# Allegro board AHC-20-001_DP_Switch_Barrier_Block_Interface.brd
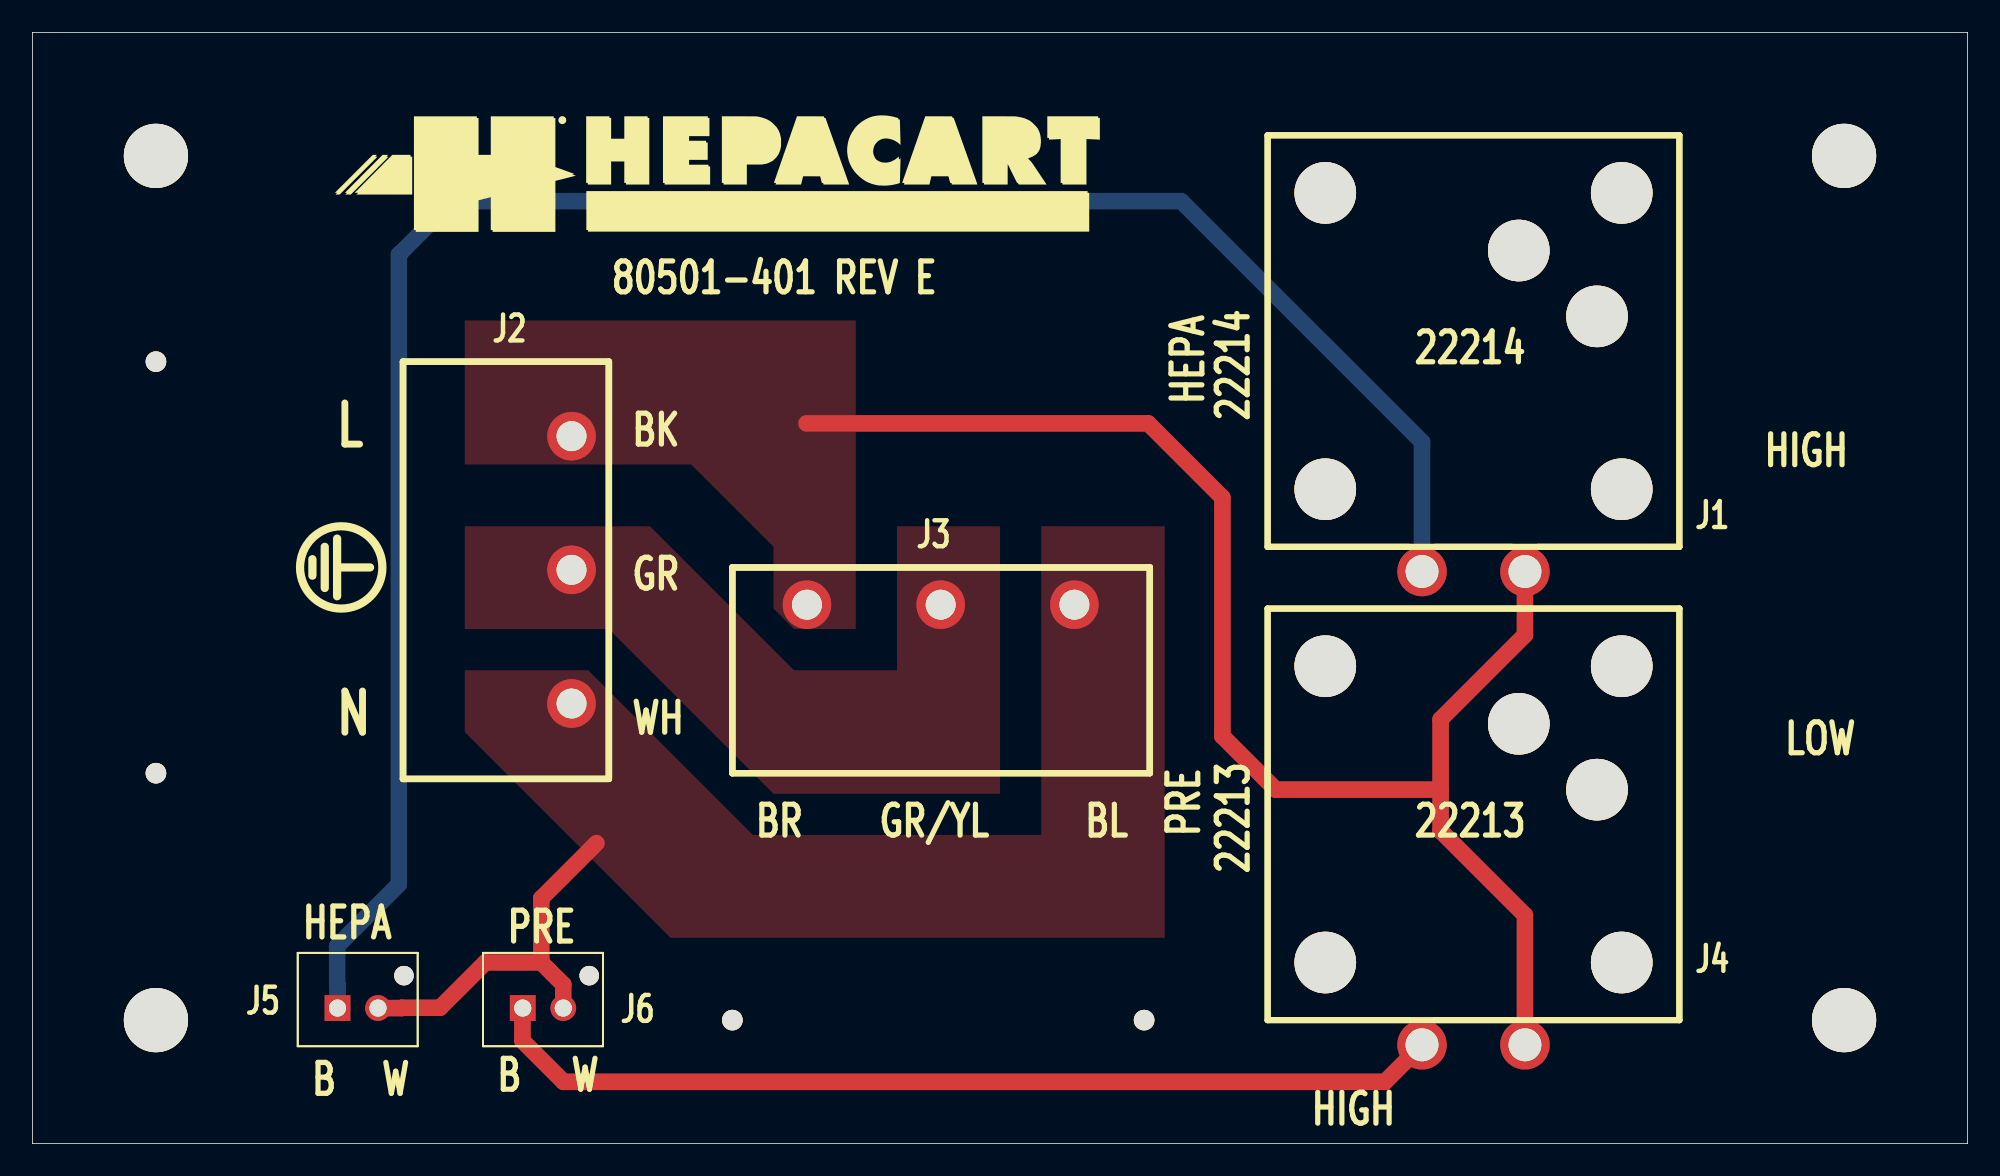
[diagram p0: board, top side]
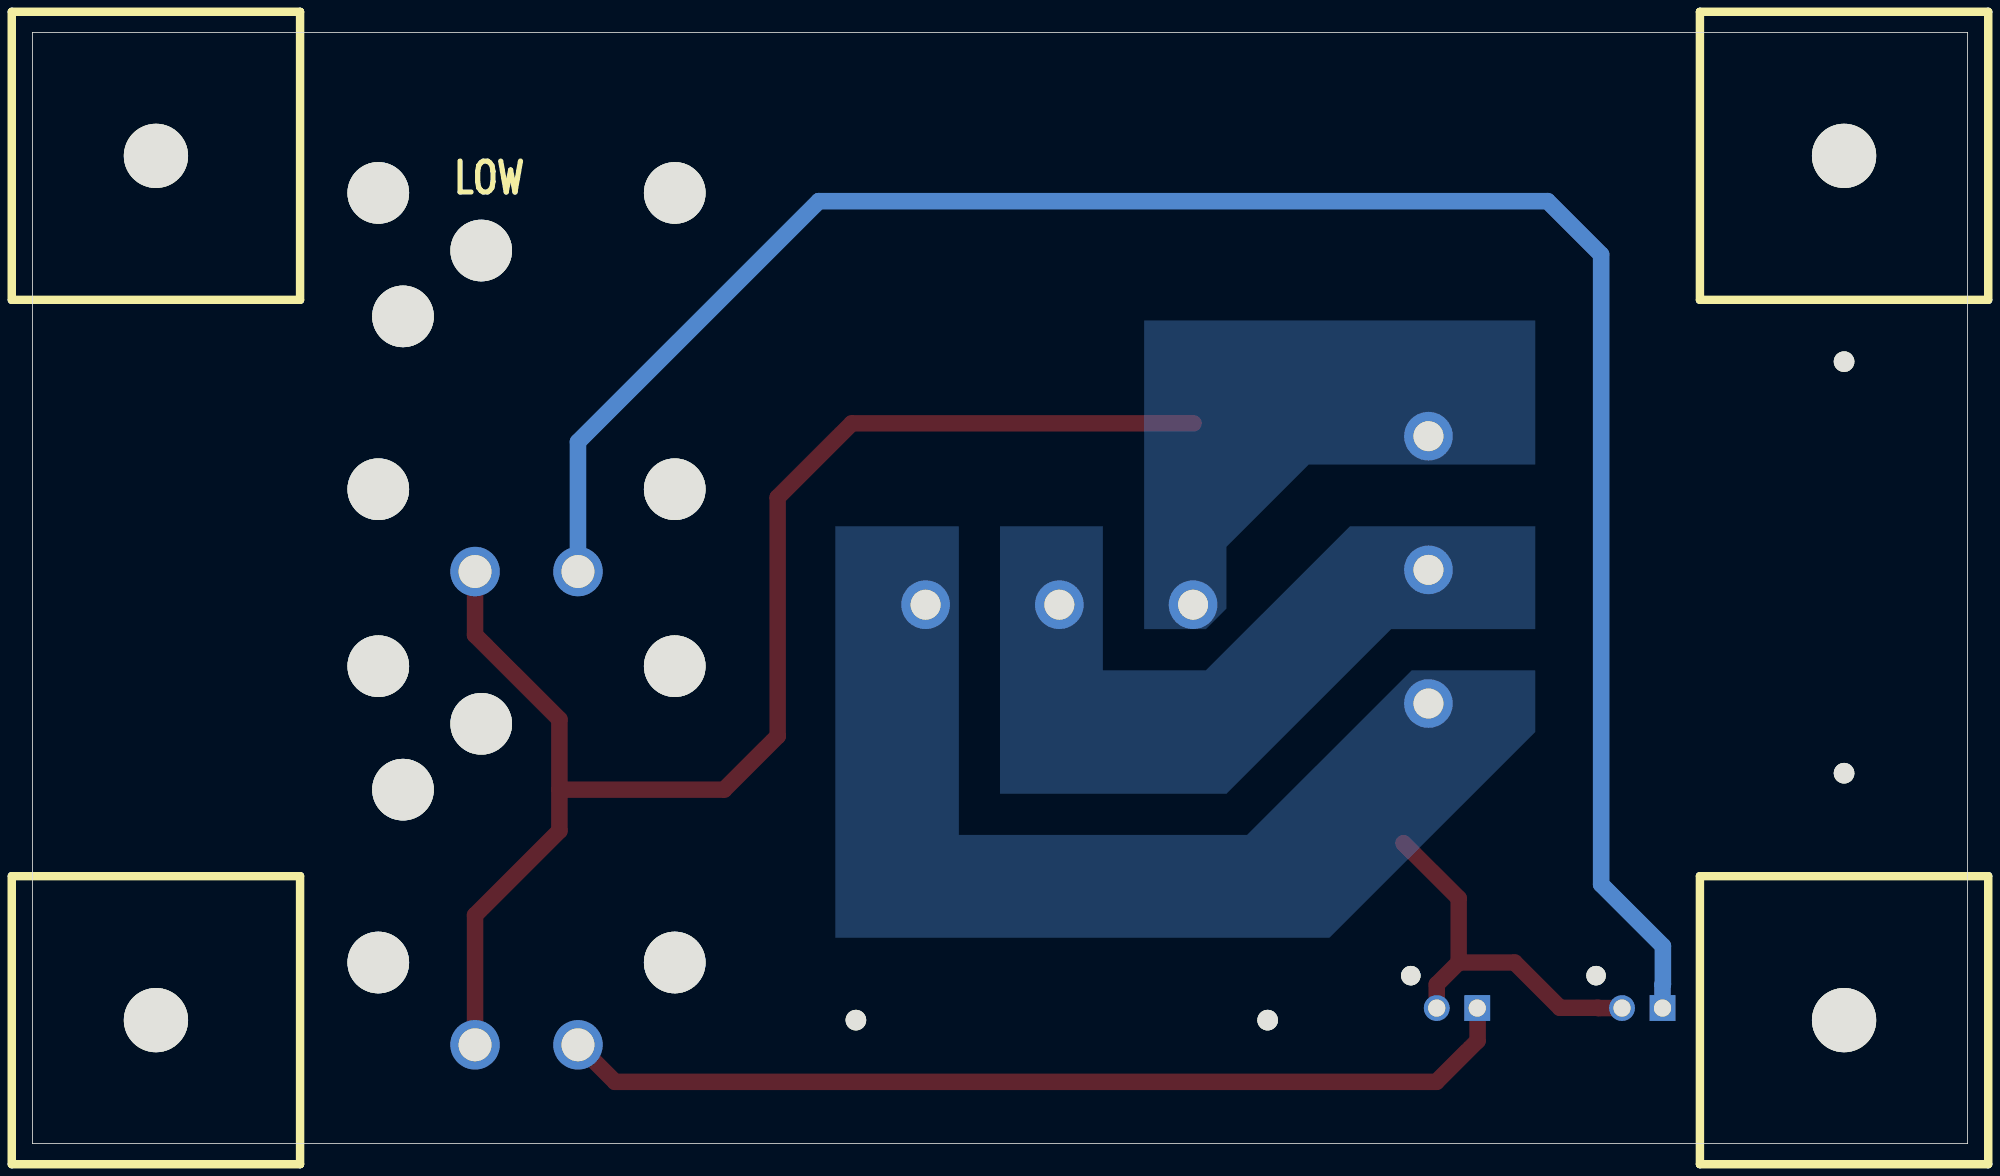
[diagram p1: board, bottom side, seen from below]

Outline 119.38 x 68.58 mm; copper layers: TOP, BOTTOM. Coordinates in mm from the lower left corner of the outline.
Outline path: 0,68.58 0,0 119.38,0 119.38,68.58 0,68.58

## Design rules (mm)
constraint set DEFAULT: min track width 0.152, pair gap 0.152

## Placement (name value [footprint] x y rotation side)
J1  PSF102-7451-712  [MULTICOMP_PSF102-7451-712]  76.2 62.23 90 top
J2  OSTYK42103030  [ONSHORE_OSTYK42103030]  22.86 48.26 270 top
J3  OSTYK42103030  [ONSHORE_OSTYK42103030]  43.18 22.86 0 top
J4  PSF102-7651-711  [MULTICOMP_PSF102-7651-711]  76.2 33.02 90 top
J5  B2B-XH-AM(LF)(SN)  [JST_B2B-XH-AM]  16.37 6.01 0 top
J6  B2B-XH-AM(LF)(SN)  [JST_B2B-XH-AM]  27.8 6.01 0 top
J7  LCBSB-4-01A-RT  [ESSENTRA_LCBSB-4-01A-RT]  120.65 52.07 180 bottom
J8  LCBSB-4-01A-RT  [ESSENTRA_LCBSB-4-01A-RT]  16.51 52.07 180 bottom
J9  LCBSB-4-01A-RT  [ESSENTRA_LCBSB-4-01A-RT]  120.65 -1.27 180 bottom
J10  LCBSB-4-01A-RT  [ESSENTRA_LCBSB-4-01A-RT]  16.51 -1.27 180 bottom
NOREF  -  []  18.39 56.06 0 top
NOREF#2  -  [unnamed#2]  7.62 48.26 0 top
NOREF#3  -  []  -17.78 -101.6 0 top
NOREF#4  -  []  7.62 60.96 90 top
NOREF#5  -  []  119.38 0 90 top
NOREF#6  -  [unnamed#2]  68.58 7.62 0 top
NOREF#7  -  []  0 0 0 top
NOREF#8  -  [unnamed#2]  43.18 7.62 0 top
NOREF#9  -  [unnamed#2]  7.62 22.86 0 top
NOREF#10  -  []  0 68.58 0 top

## Library data of the parts
J1 J4-J6 = CON_2
J2 J3 = CON_3
J7-J10 = MECHANICAL

## Footprints (pads in the part's own frame, mm; a bottom-side part is the same pattern mirrored in y, then rotated)
ESSENTRA_LCBSB-4-01A-RT
  round 3.962 hole 3.962 unplated: (8.89,8.89)
JST_B2B-XH-AM
  round 1.199 hole 1.199: (6.551,4.351)
  rect 1.59x1.59 hole 1.059: 1(2.451,2.349)
  round 1.59 hole 1.059: 2(4.95,2.349)
MULTICOMP_PSF102-7451-712
  round 3.8 hole 3.8: (-21.844,-3.556) (-21.844,-21.844) (-11.176,-20.32) (-7.112,-15.494) (-3.556,-3.556) (-3.556,-21.844)
  round 3.051 hole 2.029: 1(-26.924,-9.525) 2(-26.924,-15.875)
MULTICOMP_PSF102-7651-711
  round 3.8 hole 3.8: (-21.844,-3.556) (-21.844,-21.844) (-11.176,-20.32) (-7.112,-15.494) (-3.556,-3.556) (-3.556,-21.844)
  round 3.051 hole 2.029: 1(-26.924,-9.525) 2(-26.924,-15.875)
ONSHORE_OSTYK42103030
  round 3 hole 1.849: 1(4.6,10.399) 2(12.85,10.399) 3(21.1,10.399)
unnamed#2
  round 1.27 hole 3.962 unplated: (0,0)

## Nets
GND_EARTH: J2.2 J3.2
GND_NEUTRAL: J2.3 J3.3 J5.2 J6.2
HOT: J1.2 J2.1 J3.1 J4.2
N01013: J1.1 J5.1
N01019: J4.1 J6.1

## Routing (per net, layer and track width the routed paths; a pad name or vN(x,y) marks a point on that pad's centre or on a via; arc(x,y) is an arc through that point)
GND_NEUTRAL: length 23.4
  TOP w1.016: 34.8,18.54 31.39,15.14 31.39,11.18 ; 31.39,11.18 27.94,11.18 25.15,8.38 22.79,8.38 22.78,8.36 J5.2 ; 31.39,11.18 32.75,9.82 J6.2
HOT: length 90.6
  TOP w1.016: 86.87,21.84 76.71,21.84 73.41,25.15 73.41,39.88 68.83,44.45 47.75,44.45 ; 86.87,21.84 86.87,26.18 92.08,31.39 J1.2 ; 86.87,21.84 86.87,19.3 92.08,14.1 J4.2
N01013: length 126.7
  BOTTOM w1.016: J1.1 85.72,43.31 70.87,58.17 25.91,58.17 22.61,54.87 22.61,16 18.8,12.19 18.8,9.84 18.82,9.82 J5.1
N01019: length 59.5
  TOP w1.016: J6.1 30.23,8.34 30.23,6.35 32.77,3.81 83.44,3.81 J4.1

## Copper pours and planes (outline as drawn; the poured copper is in the pictures)
GND_EARTH on TOP, BOTTOM: 26.67,38.1 26.67,31.75 35.56,31.75 45.72,21.59 59.69,21.59 59.69,38.1 53.34,38.1 53.34,29.21 46.99,29.21 38.1,38.1
GND_NEUTRAL on TOP, BOTTOM: 26.67,29.21 34.29,29.21 44.45,19.05 62.23,19.05 62.23,38.1 69.85,38.1 69.85,12.7 39.37,12.7 26.67,25.4
HOT on TOP, BOTTOM: 26.67,50.8 50.8,50.8 50.8,31.75 46.99,31.75 45.72,33.02 45.72,36.83 40.64,41.91 26.67,41.91

## Text on the board
Ref Des/Silkscreen Bottom: LOW
Ref Des/Silkscreen Top: HEPA | B | W | PRE | 80501-401 REV E | BK | GR | WH | BR | GR/YL | BL | HIGH | 22214 | 22213 | LOW | L | N
XSECTION_CHART: STACKUP TABLE | Unit = Mils | # | 1 | 2 | NAME | TOP | BOTTOM | TYPE | SURFACE | CONDUCTOR | DIELECTRIC | MATERIAL | AIR | COPPER | FR-4 | TOTAL THICKNESS | THICKNESS | 0 | 1.7 | 58.6 | 62
User.6: FABRICATION NOTES (UNLESS OTHERWISE SPECIFIED): | 1. TOP SIDE SHOWN. | 2. BUILD IN ACCORDANCE WITH ALL IPC STANDARDS RELEVANT TO PRINTED | CIRCUIT BOARD FABRICATION. | 3. DIELECTRIC MATERIAL SHALL MEET THE REQUIREMENTS TYPE 370HR PER STACKUP | DETAIL OR EQUIVALENT AND SATISFY ANY IMPEDANCE REQUIREMENTS. | 4. DRILL HOLE, SLOT, AND CUTOUT DIMENSIONS ARE SHOWN AFTER PLATING. | 5. SILKSCREEN BOTH SIDES USING EPOXY OR ACRYLIC BASED WHITE NON-CONDUCTIVE | SILKSCREEN. SILKSCREEN TO BE REMOVED FROM ANY CONDUCTIVE SURFACE. | 6. ETCH VENDOR ID, UL DESIGNATION, AND DATECODE ON THE BACKSIDE. | 7. SOLDER MASK BOTH SIDES GREEN. NO SOLDERMASK ON COMPONENT PINS. | 8. IMPEDANCE REQUIREMENTS ARE AS FOLLOWS. +/- 10%. | IF PRESENT, ALL OUTER 6.25 MIL WIDE TRACES 50 OHM SINGLE ENDED. | IF PRESENT, ALL INNER 5.25 MIL WIDE TRACES 50 OHM SINGLE ENDED. | TRACE WIDTHS SHALL NOT BE MODIFIED WITHOUT APPROVAL. | 9. NO CHANGES WILL BE ALLOWED TO DESIGN WITHOUT SPECIFIC APPROVAL. | 10. ALL MATERIALS ARE TO BE ROHS AND WEEE COMPLIANT. | 11. LAYER STACKUP INFORMATION INCLUDED IN THIS DRAWING SHOWS OUTER LAYER | THICKNESS AFTER PLATING AND SUPERSEDES ANY OTHER DESIGN DOCUMENTATION. | 12. ELECTRICALLY DISCONNECTED COPPER THIEVING IS ACCEPTABLE TO HELP MAINTAIN | COPPER PLATING DISTRIBUTION IN LOW PRESSURE AREAS TO AVOID DELAMINATION. | 13. <DO NOT> PROVIDE BOARDS IN ARRAY FORMAT. ARRAYS SHOULD HAVE MINIMUM OF | 250 MILS ON ALL SIDES.
User.7: ASSEMBLY TOP NOTES (UNLESS OTHERWISE SPECIFIED): | 1. ASSEMBLE AND INSPECT IN ACCORDANCE WITH ALL IPC STANDARDS RELEVANT | TO PRINTED CIRCUIT BOARD ASSEMBLY. | 2. ALL MATERIALS ARE TO BE ROHS AND WEEE COMPLIANT. | 3. IF BARE BOARDS ARE SUPPLIED THEY WILL BE AN <ARRAY OR INDIVIDUAL PEICES>. | 4. ONLY PARTS CONTAINED IN BILL OF MATERIALS SHALL USED FOR TURN-KEY | ASSEMBLY UNLESS EQUIVALENT PART IS APPROVE. | 5. REMOVE ANY KAPTON TAPE COVERING COMPONENTS. | 6. "DNI" REFERENCE IN BILL OF MATERIALS MEANS DO NOT INSTALL ON PCB. | 7. RETURN ANY UNASSEMBLED OR EXTRA COMPONENTS WITH ASSEMBLED PCBS. | 8. REFLOW HEAT PROFILE ARE REQUIRED TO PROPERLY ATTACH COMPONENTS. | 9. HIDDEN PINS ON BGA OR CSP PACKAGES ARE REQUIRED TO BE X-RAY'ED FOR | PROPER SOLDER ATTACH. | 10. REMOVE ARRAY MOUSE BITES ON EDGE OF FINISHED PCB WITH PLUNGE ROUTER. | 11. SOLDERMASK BARREL RELIEF TO AVOID ASSEMBLY ISSUES ON LARGE SURFACE | MOUNT PADS IS ACCEPTABLE. | 13. ASSEMBLY VARIATIONS EXIST IN THIS DESIGN AND A BILL OF MATERIALS FOR | EACH VARIANT IS PROVIDED.
User.8: ASSEMBLY BOTTOM NOTES (UNLESS OTHERWISE SPECIFIED): | 1. USE ASSEMBLY TOP NOTES.
User.14: FIGURE | FINISHED_SIZE | 41.7 | 47.2 | 72.8 | 79.9 | 149.6 | 156.0 | DRILL CHART: TOP to BOTTOM | ALL UNITS ARE IN MILS | TOLERANCE_DRILL | +4.0/-4.0 | +5.0/-5.0 | +5.1/-5.1 | +8.0/-8.0 | +3.0/-3.0 | PLATED | NON-PLATED | QTY | 4 | 2 | 6 | 12
